# Altium PCB resistance_box_PCB.PcbDoc
Units mm, origin at the board's own origin, x right, y up, seen from the top; angles counter-clockwise.
Board outline 100 x 100 mm, 2 copper layers (Top Layer, Bottom Layer); 41 components, 39 nets, 226 pads, 4 vias.
Unrouted connection lines stored in the file: 26.
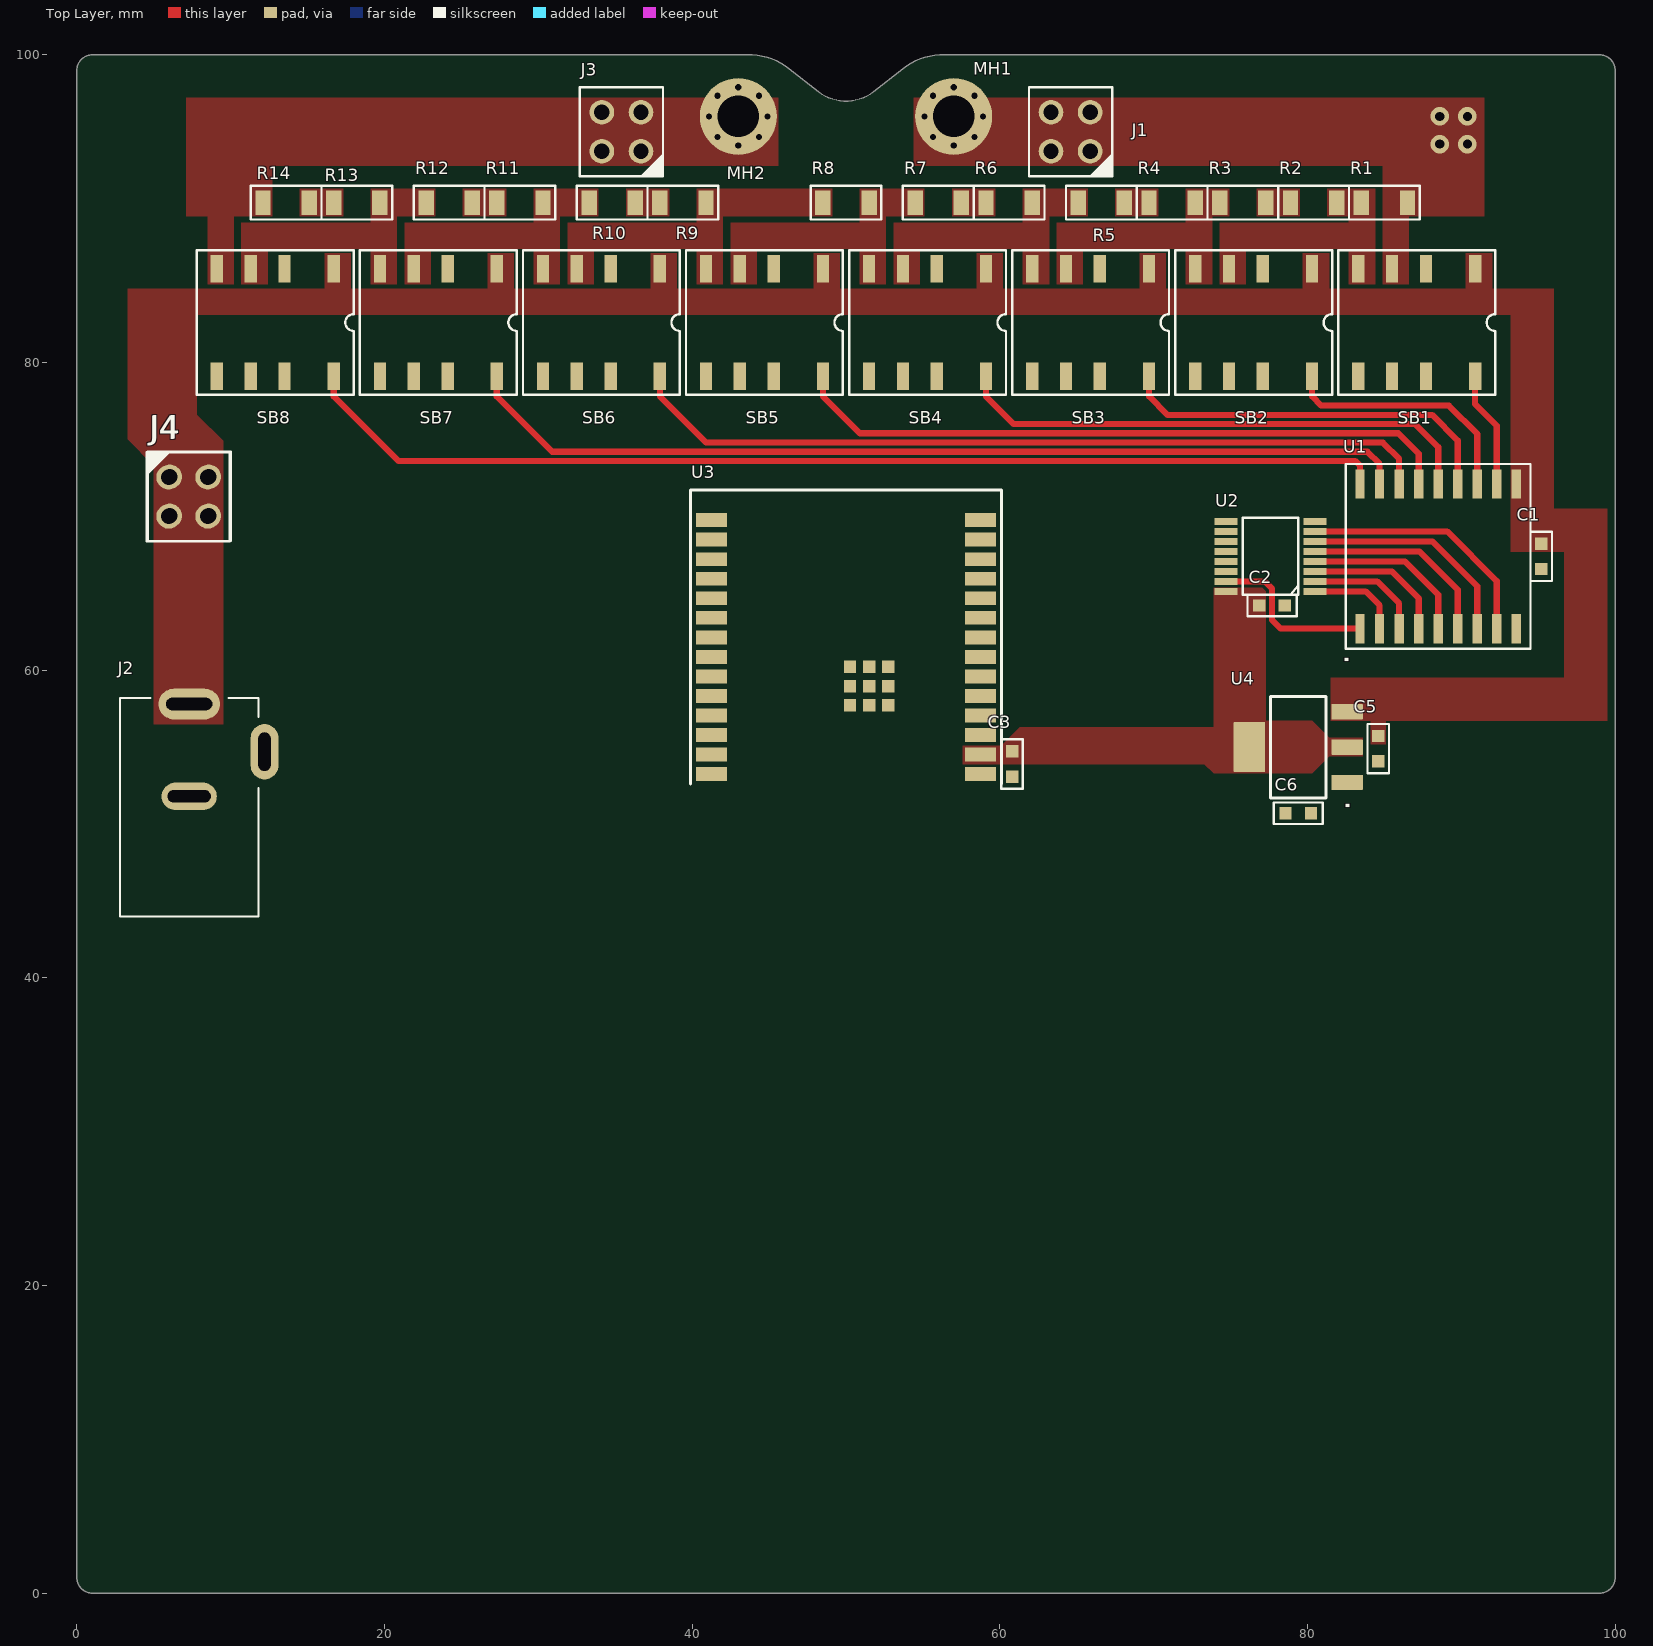
[diagram p0: Top Layer view]
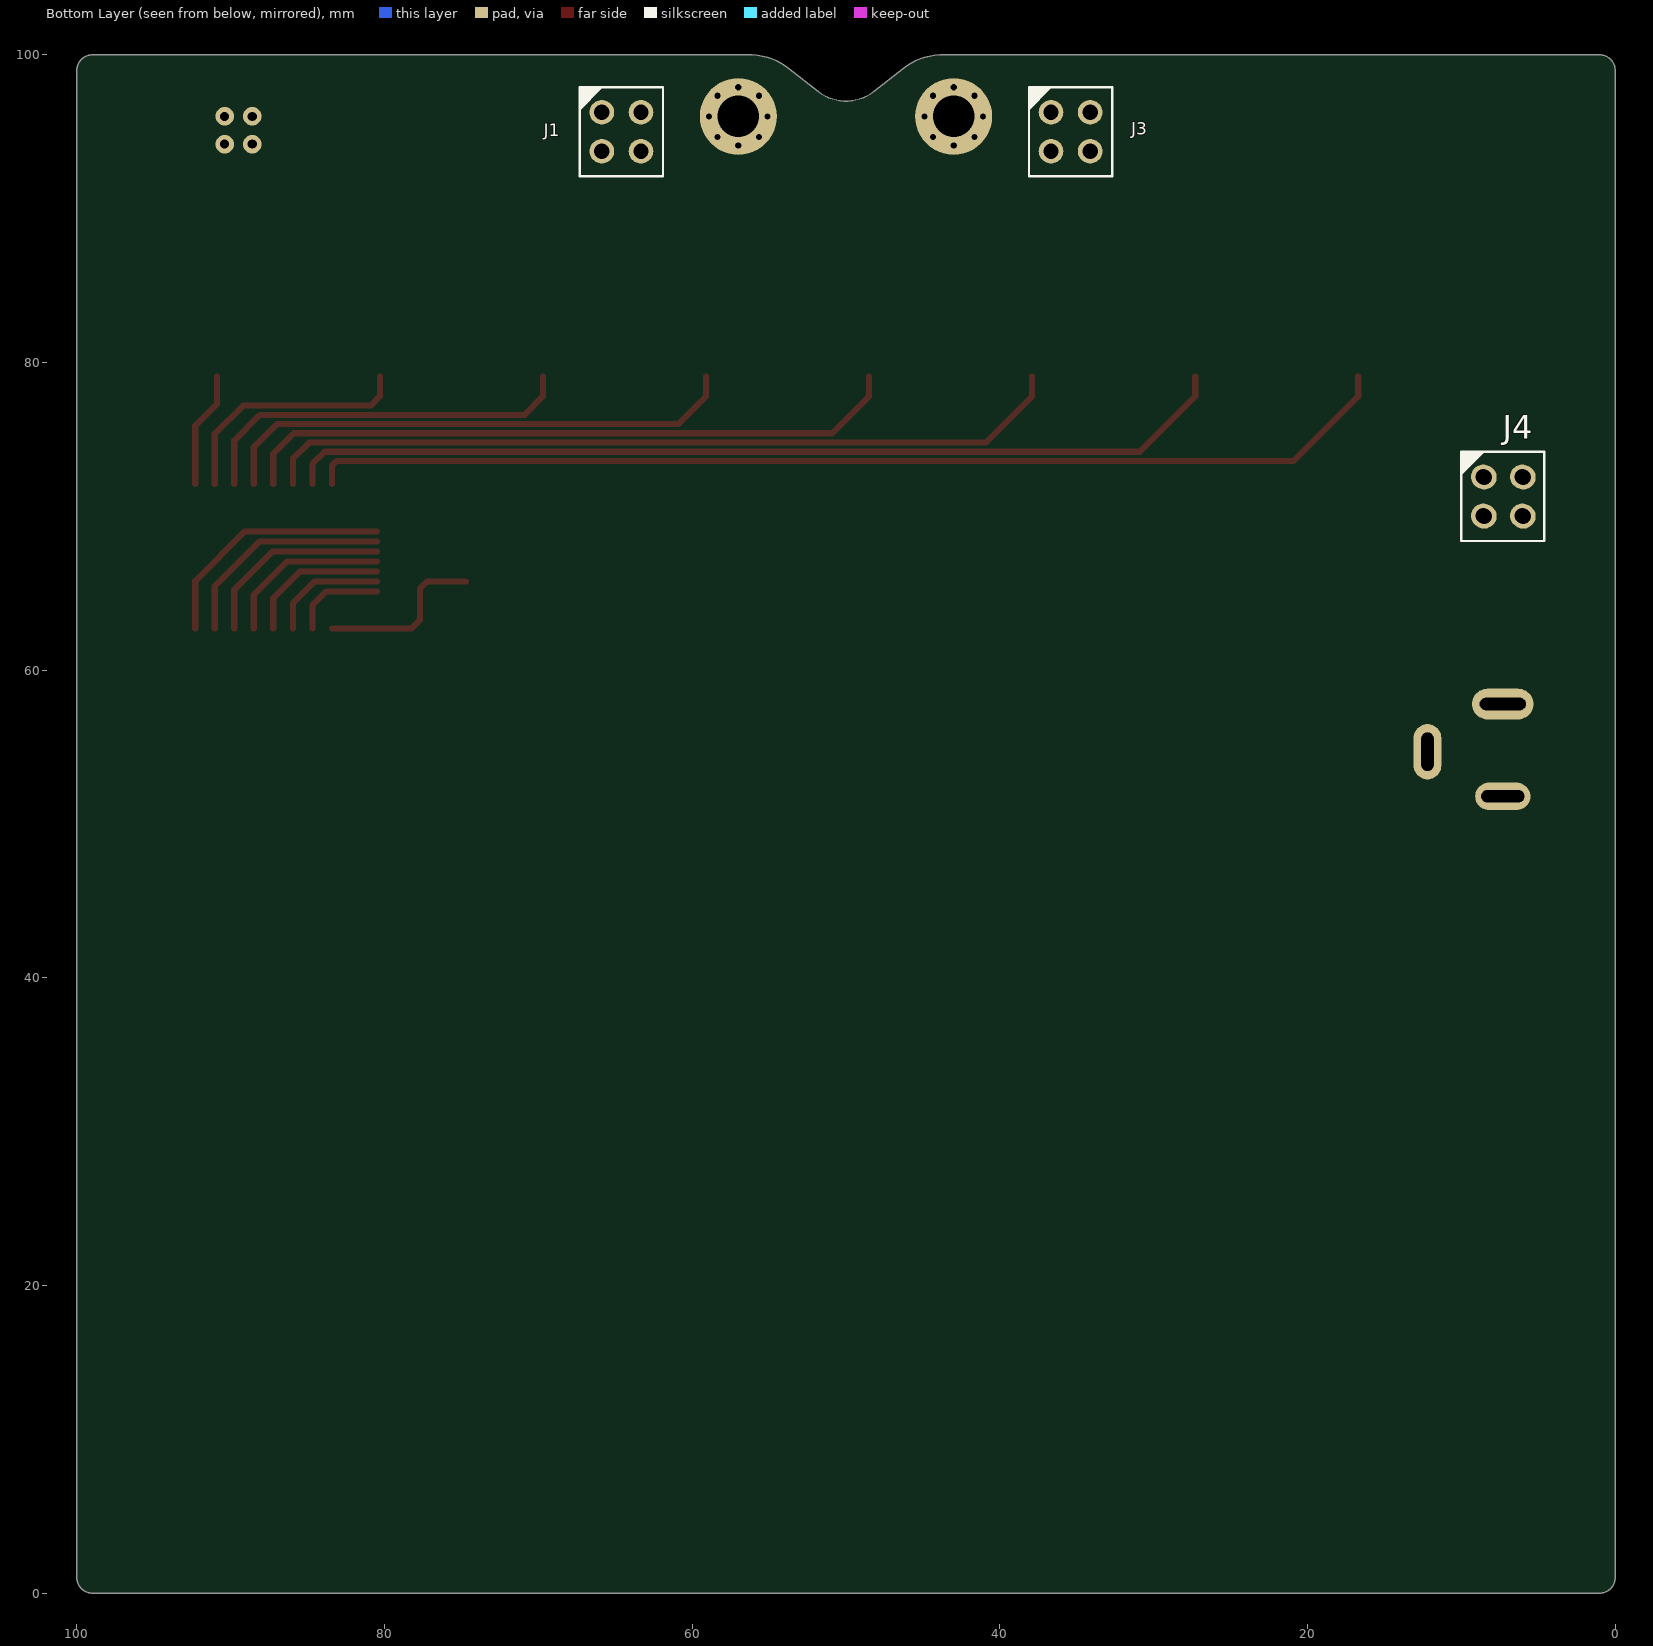
[diagram p1: Bottom Layer view, seen from below]
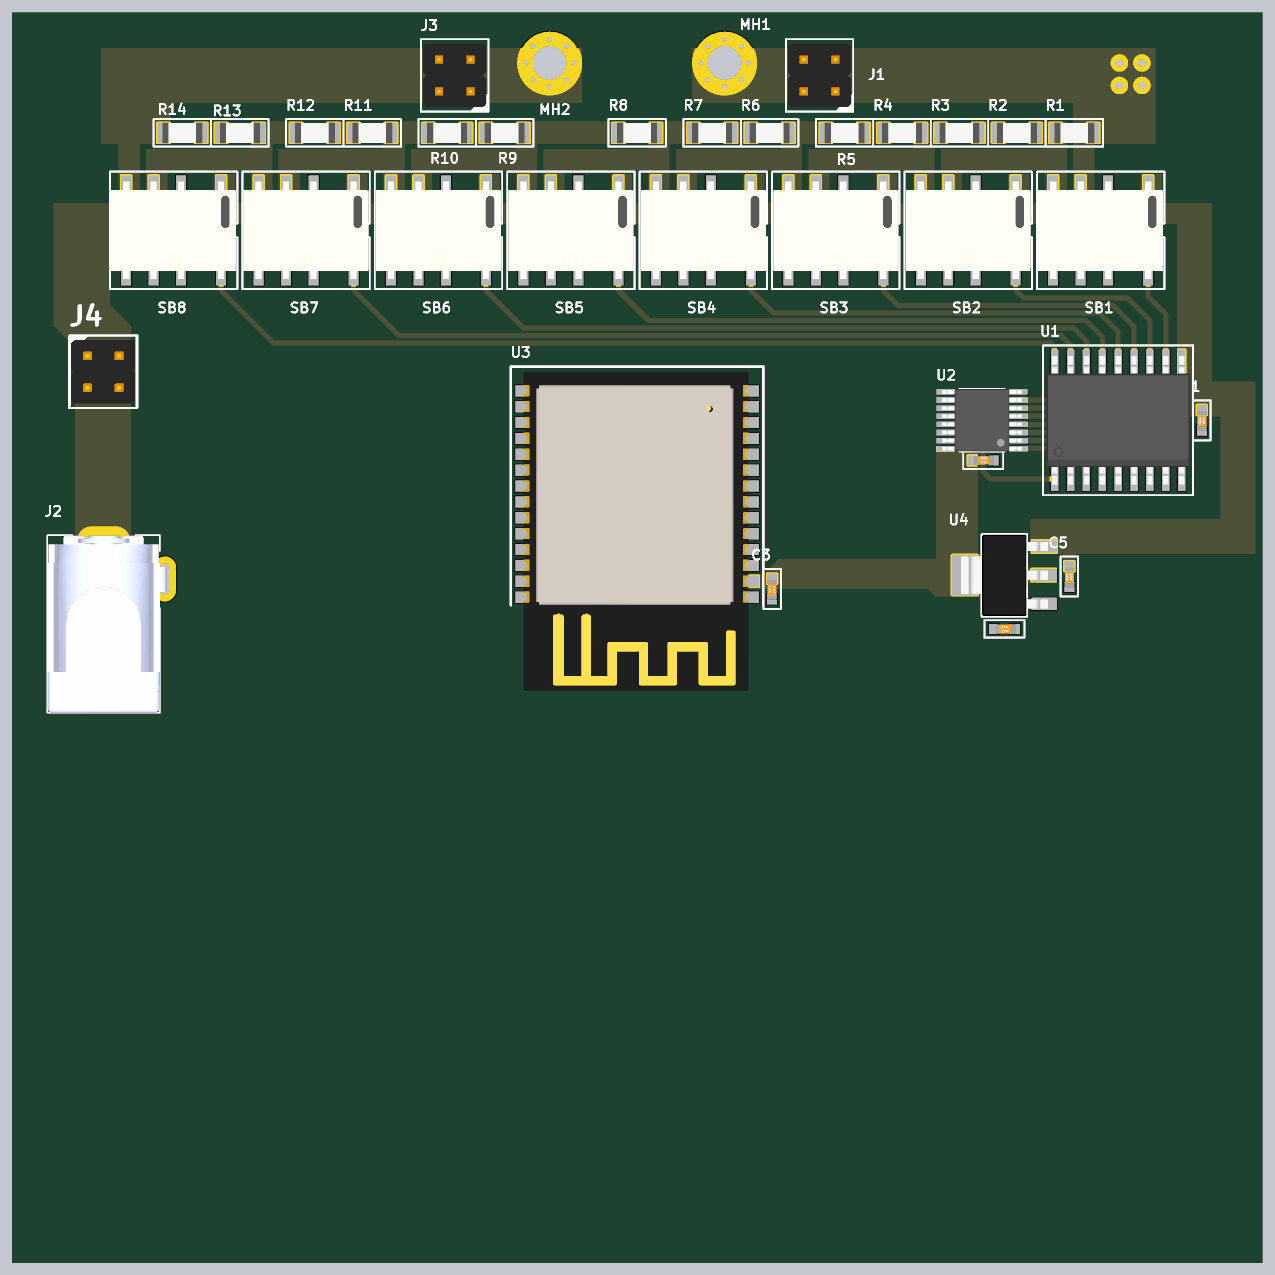
[diagram p2: 3D render of the assembled board from above, using the file's embedded part models]
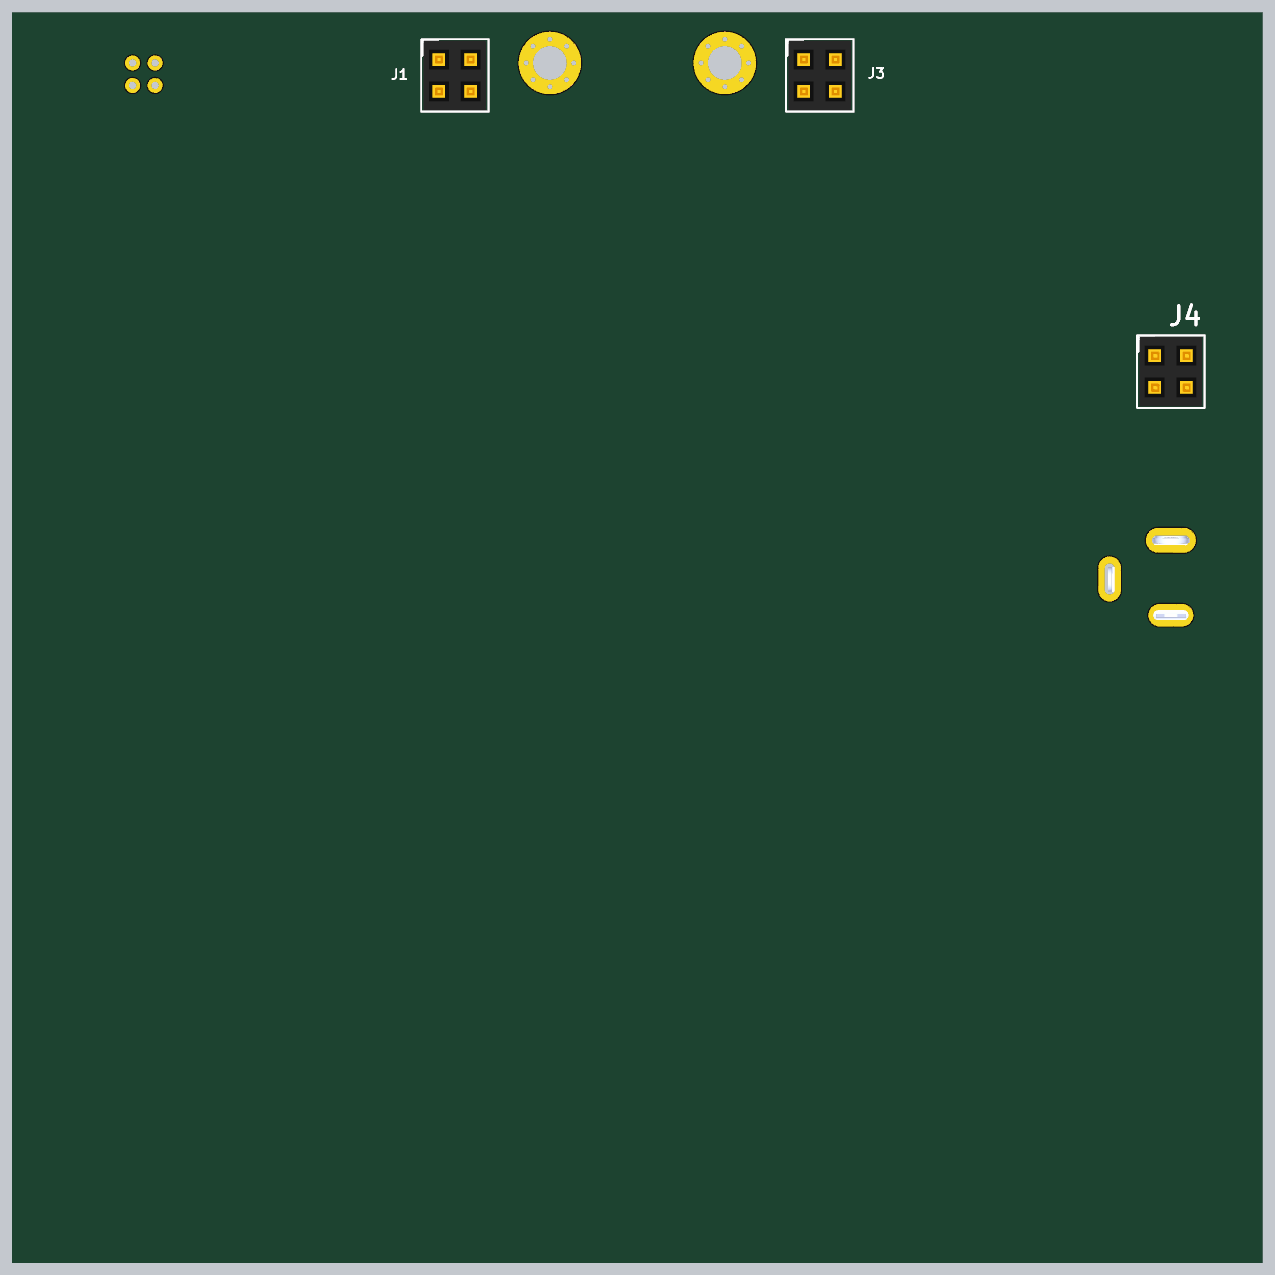
[diagram p3: 3D render of the assembled board from below, using the file's embedded part models]

## Layer stack, top to bottom
Top Solder: solder mask 0.0102, Solder Resist, Dk 3.5
Top Layer: signal copper 0.0356
Dielectric 1: dielectric 0.32, FR-4, Dk 4.8
Bottom Layer: signal copper 0.0356
Bottom Solder: solder mask 0.0102, Solder Resist, Dk 3.5

## Board outline
0,1 0,99 cw(c1,99) 1,100 43.9,100 cw(c43.715,95.856) 46.3,99.1 48.2,97.6 ccw(c50,99.992) 51.8,97.6 53.7,99.1 cw(c56.285,95.856) 56.1,100 99,100 cw(c99,99) 100,99 100,1 cw(c99,1) 99,0 1,0 cw(c1,1)

## Design rules (kind name [scope] priority, off if disabled: settings)
BoardOutlineClearance [All] p1: gap=0.3 ignorepadtopadclearanceinfootprint=FALSE except(0.4: Arc-SplitBarrior Arc-SplitContinuation Track-SplitBarrior Track-SplitContinuation SMDPad-SplitBarrior SMDPad-SplitContinuation THPad-SplitBarrior THPad-SplitContinuation Via-SplitBarrior Via-SplitContinuation Fill-SplitBarrior Fill-SplitContinuation Poly-SplitBarrior Poly-SplitContinuation Region-SplitBarrior Region-SplitContinuation Text-SplitBarrior Text-SplitContinuation)
Clearance "Clearance Different Nets" [All] p1: gap=0.2 ignorepadtopadclearanceinfootprint=FALSE except(0.089: Arc-Arc Arc-Track Arc-SMDPad Track-Track Track-SMDPad; 0.127: SMDPad-SMDPad SMDPad-Via THPad-Via Via-Via; 0.254: Arc-Via Arc-Text Track-Via Track-Text SMDPad-Text THPad-Text Via-Text Fill-Text Poly-Text Region-Text Text-Text; 0.5: THPad-THPad Via-Hole)
Clearance "Clearance Same Nets" [All] p2: gap=0.2 ignorepadtopadclearanceinfootprint=FALSE except(0.089: Arc-Arc Arc-Track Arc-SMDPad Track-Track Track-SMDPad SMDPad-SMDPad; 0.127: SMDPad-Via THPad-Via; 0.254: Arc-Via Arc-Text Track-Via Track-Text SMDPad-Text THPad-Text Via-Via Via-Text Fill-Text Poly-Text Region-Text Text-Text)
Clearance "Clearance Bottom Layer" [OnLayer('Bottom Layer')] p3: gap=0.203 ignorepadtopadclearanceinfootprint=TRUE except(0.254: Arc-Text Track-Text SMDPad-Text THPad-Text Via-Text Fill-Text Poly-Text Region-Text Text-Text)
Clearance "Clearance Top Layer" [OnLayer('Top Layer')] p4: gap=0.203 ignorepadtopadclearanceinfootprint=TRUE except(0.254: Arc-Text Track-Text SMDPad-Text THPad-Text Via-Text Fill-Text Poly-Text Region-Text Text-Text)
HoleSize [All] p1: absolutevalues=TRUE maxlimit=6.3 minlimit=0.2 maxpercent=80.000 minpercent=20.000
MinimumAnnularRing [All] p1: minimumring=0.13
MinimumSolderMaskSliver [All] p1: minsoldermaskwidth=0.1
PolygonConnect PolygonConnect_1 [All] p1: connectstyle=Direct reliefconductorwidth=0.508 reliefentries=4 polygonreliefangle="90 Angle" airgapwidth=0.254
RoutingCorners [All] p1: cornerstyle=Round minsetback=2.54 maxsetback=2.54
RoutingVias [All] p1: holewidth=0.5 width=1 viastyle="Through Hole" minholewidth=0.2 minwidth=0.35 maxholewidth=1 maxwidth=2
SilkToSilkClearance [All] p1: silktosilkclearance=0.1
SilkToSolderMaskClearance [IsPad] p1: minsilkscreentomaskgap=0.1 clearancetoexposedcopper=TRUE
SolderMaskExpansion [All] p1: expansion=0.102 istentingtop=FALSE
Width [All] p1: maxlimit=2.54 minlimit=0.089 preferedwidth=0.381
25 further rules are at their usual default settings.

## Classes and differential pairs
component class U_power: C5 C6 J2 J4 U4
component class U_mcu: C3 U3
component class main: J1 J3 MH1 MH2
component class U_resistors_set: C1 C2 R1 R2 R3 R4 R5 R6 R7 R8 R9 R10 R11 R12 R13 R14 SB1 SB2 SB3 SB4 SB5 SB6 SB7 SB8 U1 U2

## Components (designator, comment, footprint, x,y, rotation, side; value= is the part's Value field where it differs from the comment)
C1 "100nF" CAP0603 95.2,67.4 r90 top
C2 "100nF" CAP0603 77.7,64.2 r180 top
C3 "100nF" CAP0603 60.8,53.9 r90 top
C5 "100nF" CAP0603 84.6,54.9 r90 top
C6 "100nF" CAP0603 79.4,50.7 r180 top
J1 "PM254-2-02-Z-8.5" 254-2-2-Fem 64.6,95 r180 bottom
J1 "soon" 254-2-2-Male 64.6,95 r180 top
J2 "PJ-050A" CUI_PJ050A 7.3,57.8 r270 top
J3 "soon" 254-2-2-Male 35.4,95 r180 top
J3 "PM254-2-02-Z-8.5" 254-2-2-Fem 35.4,95 r180 bottom
J4 "PH-00068" 254-2-2-Male 7.23,71.27 r0 top
J4 "PH-00068" 254-2-2-Male 7.3,71.3 r0 top
J4 "PM254-2-02-Z-8.5" 254-2-2-Fem 7.3,71.3 r180 bottom
MH1 "5x2.5 mm" 5x2m7_plated_hole 57,96 r0 top
MH2 "5x2.5 mm" 5x2m7_plated_hole 43,96 r0 top
R1 "120" RES1206 85,90.4 r180 top
R2 "120" RES1206 80.4,90.4 r180 top
R3 "120" RES1206 75.8,90.4 r180 top
R4 "120" RES1206 71.2,90.4 r180 top
R5 "120" RES1206 66.6,90.4 r180 top
R6 "120" RES1206 60.6,90.4 r180 top
R7 "120" RES1206 56,90.4 r180 top
R8 "1k" RES1206 50,90.4 r180 top
R9 "1k" RES1206 39.4,90.4 r180 top
R10 "1k" RES1206 34.8,90.4 r180 top
R11 "1k" RES1206 28.8,90.4 r180 top
R12 "1k" RES1206 24.2,90.4 r180 top
R13 "1k" RES1206 18.2,90.4 r180 top
R14 "1k" RES1206 13.6,90.4 r180 top
SB1 "G6K-2F-Y-TR DC5" Omron_G6K-2F-Y 87.1,82.6 r270 top
SB2 "G6K-2F-Y-TR DC5" Omron_G6K-2F-Y 76.5,82.6 r270 top
SB3 "G6K-2F-Y-TR DC5" Omron_G6K-2F-Y 65.9,82.6 r270 top
SB4 "G6K-2F-Y-TR DC5" Omron_G6K-2F-Y 55.3,82.6 r270 top
SB5 "G6K-2F-Y-TR DC5" Omron_G6K-2F-Y 44.7,82.6 r270 top
SB6 "G6K-2F-Y-TR DC5" Omron_G6K-2F-Y 34.1,82.6 r270 top
SB7 "G6K-2F-Y-TR DC5" Omron_G6K-2F-Y 23.5,82.6 r270 top
SB8 "G6K-2F-Y-TR DC5" Omron_G6K-2F-Y 12.9,82.6 r270 top
U1 "ULN2803G-S18-R" SOIC-18-wide 88.5,67.4 r90 top
U2 "SN74HC595PWR" TSSOP16 77.6,67.4 r180 top
U3 "ESP32-C6-WROOM-1" ESP32-C6-WROOM-1 50,61.5 r180 top
U4 "LD1117AS33TR" SOT-223 79.4,55 r90 top

## Footprints (in the part's own frame and the unit in brackets; to place one, negate y for a bottom-side part, rotate by r counter-clockwise, add the part's x,y. Pads: shape width x height; smd on the part's side, far side on the other; paste and mask are expansions set on the pad)
5x2m7_plated_hole [mm]
  round 0.7 hole 0.4: MH(-1.9,0) MH(-1.344,-1.344) MH(-1.344,1.344) MH(0,-1.9) MH(0,1.9) MH(1.344,-1.344) MH(1.344,1.344) MH(1.9,0)
  round 5 hole 2.7: MH(0,0)
254-2-2-Fem [mm]
  round 1.6 hole 1 paste-2539.97: 1(-1.27,1.27) 2(-1.27,-1.27) 3(1.27,1.27) 4(1.27,-1.27)
  silkscreen extent -2.75,-2.9 2.7,2.9, body extent -2.52,-2.79 2.48,2.79, height 8.5
254-2-2-Male [mm]
  round 1.6 hole 1 paste-2539.97: 1(-1.27,1.27) 2(-1.27,-1.27) 3(1.27,1.27) 4(1.27,-1.27)
  silkscreen extent -2.75,-2.9 2.7,2.9, body extent -2.54,-2.54 2.54,2.54, height 8.89
CAP0603 [mm]
  rect 0.8x0.8 smd: 1(-0.825,0) 2(0.825,0)
  silkscreen extent -1.6,-0.7 1.6,0.7, body extent -0.86,-0.4 0.74,0.4, height 0.8
CUI_PJ050A [mm]
  oval 2x4 hole 0.8 slot 3 at 90 deg: 1(0,0)
  oval 1.8x3.6 hole 0.8 slot 2.8 at 90 deg: 2(6,0)
  oval 3.6x1.8 hole 0.8 slot 2.5 at 0 deg: 3(3.1,4.9)
  silkscreen extent -0.4,-4.5 13.8,4.5, body extent -0.37,-4.5 13.83,5.05, height 10.97
ESP32-C6-WROOM-1 [mm]
  rect 2x0.9 smd: 1(-8.75,8.255) 2(-8.75,6.985) 3(-8.75,5.715) 4(-8.75,4.445) 5(-8.75,3.175) 6(-8.75,1.905) 7(-8.75,0.635) 8(-8.75,-0.635) 9(-8.75,-1.905) 10(-8.75,-3.175) 11(-8.75,-4.445) 12(-8.75,-5.715) 13(-8.75,-6.985) 14(-8.75,-8.255) 15(8.75,-8.255) 16(8.75,-6.985) 17(8.75,-5.715) 18(8.75,-4.445) 19(8.75,-3.175) 20(8.75,-1.905) 21(8.75,-0.635) 22(8.75,0.635) 23(8.75,1.905) 24(8.75,3.175) 25(8.75,4.445) 26(8.75,5.715) 27(8.75,6.985) 28(8.75,8.255)
  rect 0.8x0.8 smd: 29(-2.755,2.535) 29(-2.755,3.785) 29(-2.755,1.285) 29(-1.505,3.785) 29(-1.505,2.535) 29(-1.505,1.285) 29(-0.255,3.785) 29(-0.255,2.535) 29(-0.255,1.285)
  silkscreen extent -10.1,-10.2 10.1,8.9, body extent -8.92,-9.77 9.08,15.73, height 3.16
Omron_G6K-2F-Y [mm]
  rect 1.8x0.8 smd: 1(-3.5,3.8) 2(-3.5,0.6) 3(-3.5,-1.6) 4(-3.5,-3.8) 5(3.5,-3.8) 6(3.5,-1.6) 7(3.5,0.6) 8(3.5,3.8)
  silkscreen extent -4.7,-5.1 4.7,5.1, body extent -3.9,-5 3.9,5, height 5.2
RES1206 [mm]
  rect 1x1.6 smd: 1(-1.5,0) 2(1.5,0)
  silkscreen extent -2.3,-1.1 2.3,1.1, body extent -1.6,-0.83 1.6,0.83, height 0.53
SOIC-18-wide [mm]
  rect 1.9x0.6 smd: 1(-4.7,5.08) 2(-4.7,3.81) 3(-4.7,2.54) 4(-4.7,1.27) 5(-4.7,0) 6(-4.7,-1.27) 7(-4.7,-2.54) 8(-4.7,-3.81) 9(-4.7,-5.08) 10(4.7,-5.08) 11(4.7,-3.81) 12(4.7,-2.54) 13(4.7,-1.27) 14(4.7,0) 15(4.7,1.27) 16(4.7,2.54) 17(4.7,3.81) 18(4.7,5.08)
  silkscreen extent -6,-6 6,6, body extent -5.15,-5.76 5.15,5.76, height 2.65
SOT-223 [mm]
  rrect10% 1x2.05 smd: 1(-2.3,-3.175) 2(0,-3.175) 3(2.3,-3.175)
  rrect5% 3.25x2.05 smd: 2(0,3.175)
  silkscreen extent -3.3,-1.8 3.3,1.8, body extent -3.25,-3.48 3.25,3.48, height 1.6
TSSOP16 [mm]
  rect 1.5x0.45 smd mask+0.02: 1(-2.9,2.275) 2(-2.9,1.625) 3(-2.9,0.975) 4(-2.9,0.325) 5(-2.9,-0.325) 6(-2.9,-0.975) 7(-2.9,-1.625) 8(-2.9,-2.275) 9(2.9,-2.275) 10(2.9,-1.625) 11(2.9,-0.975) 12(2.9,-0.325) 13(2.9,0.325) 14(2.9,0.975) 15(2.9,1.625) 16(2.9,2.275)
  silkscreen extent -1.8,-2.5 1.8,2.5, body extent -3.2,-2.5 3.2,2.5, height 1.1

## Part data
C1 C2 C3 C5 C6: library part GCM188R71H104KA57J, "Tolerance ±10% / Rated Voltage 50Vdc / Temperature 0±30ppm/℃", Case=0603, Manufacturer="Arrow Electronics", Supplier Part Number 1=81-GCM188R71H104KA7J, Tolerance=10%, Category="Multilayer Ceramic Capacitors - SMD/SMT", HelpURL=http://www.farnell.com/datasheets/4360.pdf?src-supplier=Element14, Item="100nF 50V  ±10%", Part Number=GCM188R71H104KA57J, Supplier 1=Mouser, Vdc=50V
J1 J3 J4: "2.54mm 2.54mm 3A Copper Alloy 4P -40℃~+105℃ 260℃@5S Straight 2x2P 8.5mm Top Square Holes Plugin,P=2.54mm Female Headers ROHS", Case=Female, Manufacturer=HCTL, Supplier Part Number 1=C2897403, Category="Headers & Wire Housings", HelpURL=https://datasheet.lcsc.com/lcsc/2306091005_HCTL-PM254-2-02-Z-8-5_C2897403.pdf?_gl=1*j2h43v*_ga*MTA1Mzg1NzAxMC4xNzEyNDA1NTIz*_ga_98M84MKSZH*MTcxNzc5MzMyMy44LjEuMTcxNzc5NDE5OC40My4wLjA., Item="Header 2.54 2x2 Female", Part Number=PM254-2-02-Z-8.5, Supplier 1=LCSC
J1 J3: "2.54mm 2.54mm 3A Copper Alloy 4P -40℃~+105℃ 260℃@5S Straight 2x2P 8.5mm Top Square Holes Plugin,P=2.54mm Female Headers ROHS"
J2: "DC Power Connectors Power Jacks Right Angle", Case=Female, Manufacturer="CUI Devices", Manufacturer Part Number=MJ-2506N, Supplier Part Number 1=490-PJ-050A, Category="DC Power Connectors", HelpURL=https://eu.mouser.com/datasheet/2/670/pj_050a-1778816.pdf, Item=PJ-050A, Part Number=PJ-050A, Supplier 1=Mouser
J4 J4: "3A Straight Square Pins 2.5mm 4P 6mm -40℃~+105℃ 3mm 2.54mm 双排 Black 2x2P 2.54mm Plugin,P=2.54mm Pin Headers ROHS"
MH1 MH2: library part none, "Plated hole 5x2.5 mm", Case=none, HelpURL=none, Item="5x2.5 mm", Manufacturer=none, Part Number=none, Supplier=none
R1 R2 R3 R4 R5 R6 R7: library part CR1206-FX-1200ELF, "Tolerance ±1% / Power (Watts) 0.25W, 1/4W / Temperature Coefficient ±100ppm/°C", Case=1206, Manufacturer=Bourns, Supplier Part Number 1=652-CR1206FX-1200ELF, Tolerance=1%, Category="Thin Film Resistors - SMD", HelpURL=https://eu.mouser.com/datasheet/2/54/cr-1858361.pdf, Item="120 ±1% 0.25W", Part Number=CR1206-FX-1200ELF, Supplier 1=Mouser
R8 R9 R10 R11 R12 R13 R14: library part CRT1206-FZ-1001ELF, "Tolerance ±1% / Power (Watts) 0.1W, 1/10W / Temperature Coefficient ±50ppm/°C", Case=1206, Manufacturer=Bourns, Supplier Part Number 1=652-CRT1206FZ1001ELF, Tolerance=1%, Category="Thin Film Resistors - SMD", HelpURL=https://eu.mouser.com/datasheet/2/54/CRT-1649066.pdf, Item="1k ±1% 0.25W", Part Number=CRT1206-FZ-1001ELF, Supplier 1=Mouser
SB1 SB2 SB3 SB4 SB5 SB6 SB7 SB8: "1A 5V DPDT (2 Form C) SMD,6.5x10mm Signal Relays ROHS", Case=SMD,6.5x10mm, Manufacturer="Omron Electronics", Supplier Part Number 1=C47190, Category="Relays/Signal Relays", HelpURL=https://www.lcsc.com/datasheet/lcsc_datasheet_2211282300_Omron-Electronics-G6K-2F-Y-TR-DC5_C47190.pdf, Item="G6K-2F-Y-TR DC5", Mechanical Life=N/A, Part Number="G6K-2F-Y-TR DC5", Supplier=LCSC, Switch Function="DPDT (2 Form C)", Vdss=5V
U1: "SOP-18 Darlington Transistor Arrays ROHS", Case=SOP-18, Manufacturer="UTC(Unisonic Tech)", Supplier Part Number 1=C33924, Category="Transistors/Thyristors/Darlington Transistor Arrays", Channel=NPN, HelpURL=https://www.lcsc.com/datasheet/lcsc_datasheet_1810241824_UTC-Unisonic-Tech-ULN2803G-S18-R_C33924.pdf, Id=500mA, Item=ULN2803, Part Number=ULN2803G-S18-R, Supplier 1=LCSC, Vds=50B
U2: "Counter Shift Registers 8-Bit Shift Register", Case=TSSOP-16, Manufacturer="Texas Instruments", Supplier Part Number 1=595-SN74HC595PWR, Category="Counter Shift Registers", HelpURL=https://www.ti.com/lit/ds/symlink/sn74hc595.pdf?HQS=dis-mous-null-mousermode-dsf-pf-null-wwe&ts=1631618497887&ref_url=https%253A%252F%252Fwww.mouser.it%252F, Item=SN74HC595, Part Number=SN74HC595PWR, Supplier 1=Mouser
U3: "ESP32-C6 module, Wi-Fi 6 in 2.4 GHz band, Bluetooth 5, Zigbee 3.0 and Thread. ESP34-WROOM Compatible", Case="Development Boards", Manufacturer="Espressif Systems", Category="Multiprotocol Modules", HelpURL=https://www.espressif.com/sites/default/files/documentation/esp32-c6-wroom-1_wroom-1u_datasheet_en.pdf, Interfaces="GPIO, SPI, UART, I2C, I2S, RMT", Item=ESP32-C6-WROOM-1, Part Number=ESP32-C6-WROOM-1, Supplier 1=Aliexpress, Supplier Part Number 1=ESP32-C6-WROOM-1, Vdss=3.3V
U4: "Linear Voltage Regulators 3.3V 1A Positive", Case=SOT-223, Input Voltage, Max=10, Manufacturer=STMicroelectronics, Output Current="1 A", Output Voltage=3,3, Category="Linear Voltage Regulators", HelpURL=https://static.chipdip.ru/lib/918/DOC012918569.pdf, Item=LD1117A, Part Number=LD1117AS33TR, Supplier 1=Chipdip, Supplier Part Number 1=LD1117AS33TR

## Via types
v1: diameter 1.2, hole 0.6, Top Layer to Bottom Layer, 4 vias

## Nets (pads, with @x,y where several pads share a name; then routed paths per layer and width w, separated by ;. In a path a pad name is that pad's centre, name@x,y a point inside that pad or via, vN(x,y) a via of type N, cw(c..) or ccw(c..) an arc to the next point about the centre after c; other vN are vias at no path point)
3v3: C2.2 C3.2 C6.2 U2.16 U3.2 U4.2
5v: C1.2 C5.2 J2.1 J4.1 J4.2 J4.3 J4.4 SB1.1 SB2.1 SB3.1 SB4.1 SB5.1 SB6.1 SB7.1 SB8.1 U1.10 U4.3
GND: C1.1 C2.1 C3.1 C5.1 C6.1 J2.2 J2.3 U1.9 U2.8 U3.1 U3.28 U3.29 U4.1
NetJ1_1: J1.1 J1.2 J1.3 J1.4 MH1.MH R1.1 SB1.3
  other v1: 88.6,94.2 90.4,94.2 88.6,96 90.4,96
NetJ3_1: J3.1 J3.2 J3.3 J3.4 MH2.MH R14.2 SB8.4
NetR1_2: R1.2 R2.1 SB1.4 SB2.3
NetR2_2: R2.2 R3.1
NetR3_2: R3.2 R4.1 SB2.4 SB3.3
NetR4_2: R4.2 R5.1
NetR5_2: R5.2 R6.1 SB3.4 SB4.3
NetR6_2: R6.2 R7.1
NetR7_2: R7.2 R8.1 SB4.4 SB5.3
NetR8_2: R8.2 R9.1 SB5.4 SB6.3
NetR9_2: R9.2 R10.1
NetR10_2: R10.2 R11.1 SB6.4 SB7.3
NetR11_2: R11.2 R12.1
NetR12_2: R12.2 R13.1 SB7.4 SB8.3
NetR13_2: R13.2 R14.1
NetSB1_8: SB1.8 U1.11 | length 7.6
  Top Layer w0.4: SB1.8 90.9,77.3 92.31,75.89 U1.11
NetSB2_8: SB2.8 U1.12 | length 16.3
  Top Layer w0.4: SB2.8 80.3,77.8 80.9,77.2 89.2,77.2 91.04,75.36 U1.12
NetSB3_8: SB3.8 U1.13 | length 25.4
  Top Layer w0.4: SB3.8 69.7,77.8 70.9,76.6 88.1,76.6 89.77,74.93 U1.13
NetSB4_8: SB4.8 U1.14 | length 34.5
  Top Layer w0.4: SB4.8 59.1,77.8 60.9,76 87,76 88.5,74.5 U1.14
NetSB5_8: SB5.8 U1.15 | length 43.5
  Top Layer w0.4: SB5.8 48.5,77.8 50.9,75.4 85.9,75.4 87.23,74.07 U1.15
NetSB6_8: SB6.8 U1.16 | length 52.7
  Top Layer w0.4: SB6.8 37.9,77.8 40.9,74.8 84.9,74.8 85.96,73.74 U1.16
NetSB7_8: SB7.8 U1.17 | length 61.8
  Top Layer w0.4: SB7.8 27.3,77.8 30.9,74.2 83.9,74.2 84.69,73.41 U1.17
NetSB8_8: SB8.8 U1.18 | length 71.1
  Top Layer w0.4: SB8.8 16.7,77.8 20.9,73.6 83.1,73.6 83.42,73.28 U1.18
NetU1_1: U1.1 U2.15 | length 11.2
  Top Layer w0.4: U2.15 77.225,65.775 77.7,65.3 77.7,63.253 78.253,62.7 U1.1
NetU1_2: U1.2 U2.1 | length 6.1
  Top Layer w0.4: U2.1 83.775,65.125 84.69,64.21 U1.2
NetU1_3: U1.3 U2.2 | length 7.7
  Top Layer w0.4: U2.2 84.525,65.775 85.96,64.34 U1.3
NetU1_4: U1.4 U2.3 | length 9.4
  Top Layer w0.4: U2.3 85.475,66.425 87.23,64.67 U1.4
NetU1_5: U1.5 U2.4 | length 11.1
  Top Layer w0.4: U2.4 86.325,67.075 88.5,64.9 U1.5
NetU1_6: U1.6 U2.5 | length 12.8
  Top Layer w0.4: U2.5 87.275,67.725 89.77,65.23 U1.6
NetU1_7: U1.7 U2.6 | length 14.5
  Top Layer w0.4: U2.6 88.125,68.375 91.04,65.46 U1.7
NetU1_8: U1.8 U2.7 | length 16.2
  Top Layer w0.4: U2.7 89.075,69.025 92.31,65.79 U1.8
NetU2_10: U2.10 U3.14
NetU2_11: U2.11 U3.13
NetU2_12: U2.12 U3.12
NetU2_13: U2.13 U3.11
NetU2_14: U2.14 U3.10
pads on no net: SB1.2 SB1.5 SB1.6 SB1.7 SB2.2 SB2.5 SB2.6 SB2.7 SB3.2 SB3.5 SB3.6 SB3.7 SB4.2 SB4.5 SB4.6 SB4.7 SB5.2 SB5.5 SB5.6 SB5.7 SB6.2 SB6.5 SB6.6 SB6.7 SB7.2 SB7.5 SB7.6 SB7.7 SB8.2 SB8.5 SB8.6 SB8.7 U2.9 U3.3 U3.4 U3.5 U3.6 U3.7 U3.8 U3.9 U3.15 U3.16 U3.17 U3.18 U3.19 U3.20 U3.21 U3.22 U3.23 U3.24 U3.25 U3.26 U3.27

## Polygon pours and split planes (outlines as drawn)
5v on Top Layer (solid, pour order 43): 3.3,84.8 17.8,84.8 17.8,83.1 7.8,83.1 7.8,76.6 9.5,74.9 9.5,56.5 5,56.5 5,73.3 3.3,75
NetR8_2 on Top Layer "NETR8_2_L01_P005" (solid, pour order 5): 49.1,91.3 40.3,91.3 40.3,85.1 42,85.1 42,89.5 49.1,89.5
3v3 on Top Layer "3V3_L01_P040" (solid, pour order 40): 57.6,55.1 57.6,53.9 73.3,53.9 73.9,53.3 74.3,53.3 74.3,56.3 61.3,56.3 60.1,55.1
5v on Top Layer "5V_L01_P039" (solid, pour order 39): 84.1,56.7 84.1,55.2 85.1,55.2 85.1,56.7 99.5,56.7 99.5,59.5 81.5,59.5 81.5,56.7
5v on Top Layer "5V_L01_P038" (solid, pour order 38): 96.7,56.7 99.5,56.7 99.5,70.5 96.7,70.5
5v on Top Layer "5V_L01_P037" (solid, pour order 37): 99.5,67.7 99.5,70.5 93.2,70.5 93.2,67.7
3v3 on Top Layer "3V3_L01_P036" (solid, pour order 36): 83.6,55.6 83.6,54.4 81.4,54.4 80.3,53.3 73.9,53.3 73.9,56.7 80.3,56.7 81.4,55.6
5v on Top Layer "5V_L01_P033" (solid, pour order 33): 96,84.8 96,67.7 93.2,67.7 93.2,83.1 90.3,83.1 90.3,87.1 92,87.1 92,84.8
NetJ1_1 on Top Layer "NETJ1_1_L01_P035" (solid, pour order 35): 91.5,92.8 91.5,97.2 54.4,97.2 54.4,92.8
NetJ3_1 on Top Layer "NETJ3_1_L01_P034" (solid, pour order 34): 7.1,92.8 7.1,97.2 45.6,97.2 45.6,92.8
5v on Top Layer "5V_L01_P032" (solid, pour order 32): 92,83.1 79.7,83.1 79.7,87.1 81.4,87.1 81.4,84.8 92,84.8
5v on Top Layer "5V_L01_P031" (solid, pour order 31): 81.4,83.1 69.1,83.1 69.1,87.1 70.8,87.1 70.8,84.8 81.4,84.8
5v on Top Layer "5V_L01_P030" (solid, pour order 30): 70.8,83.1 58.5,83.1 58.5,87.1 60.2,87.1 60.2,84.8 70.8,84.8
5v on Top Layer "5V_L01_P029" (solid, pour order 29): 60.2,83.1 47.9,83.1 47.9,87.1 49.6,87.1 49.6,84.8 60.2,84.8
5v on Top Layer "5V_L01_P028" (solid, pour order 28): 49.6,83.1 37.3,83.1 37.3,87.1 39,87.1 39,84.8 49.6,84.8
5v on Top Layer "5V_L01_P027" (solid, pour order 27): 39,83.1 26.7,83.1 26.7,87.1 28.4,87.1 28.4,84.8 39,84.8
5v on Top Layer "5V_L01_P026" (solid, pour order 26): 28.4,83.1 16.1,83.1 16.1,87.1 17.8,87.1 17.8,84.8 28.4,84.8
NetR1_2 on Top Layer "NETR1_2_L01_P025" (solid, pour order 25): 84.4,89.1 74.3,89.1 74.3,85.1 76,85.1 76,87.4 84.4,87.4
NetR3_2 on Top Layer "NETR3_2_L01_P024" (solid, pour order 24): 73.8,89.1 63.7,89.1 63.7,85.1 65.4,85.1 65.4,87.4 73.8,87.4
NetR5_2 on Top Layer "NETR5_2_L01_P023" (solid, pour order 23): 63.2,89.1 53.1,89.1 53.1,85.1 54.8,85.1 54.8,87.4 63.2,87.4
NetR7_2 on Top Layer "NETR7_2_L01_P022" (solid, pour order 22): 52.6,89.1 42.5,89.1 42.5,85.1 44.2,85.1 44.2,87.4 52.6,87.4
NetR8_2 on Top Layer "NETR8_2_L01_P021" (solid, pour order 21): 42,89.1 31.9,89.1 31.9,85.1 33.6,85.1 33.6,87.4 42,87.4
NetR10_2 on Top Layer "NETR10_2_L01_P020" (solid, pour order 20): 31.4,89.1 21.3,89.1 21.3,85.1 23,85.1 23,87.4 31.4,87.4
NetR12_2 on Top Layer "NETR12_2_L01_P019" (solid, pour order 19): 20.8,89.1 10.7,89.1 10.7,85.1 12.4,85.1 12.4,87.4 20.8,87.4
NetR1_2 on Top Layer "Top Layer-NetR1_2" (solid, pour order 17): 82.7,85.1 84.4,85.1 84.4,91.3 81.3,91.3 81.3,89.5 82.7,89.5
NetR2_2 on Top Layer "NETR2_2_L01_P015" (solid, pour order 15): 76.7,91.3 79.5,91.3 79.5,89.5 76.7,89.5
NetR4_2 on Top Layer "NETR4_2_L01_P014" (solid, pour order 14): 67.5,91.3 70.3,91.3 70.3,89.5 67.5,89.5
NetR6_2 on Top Layer "NETR6_2_L01_P013" (solid, pour order 13): 56.9,91.3 59.7,91.3 59.7,89.5 56.9,89.5
NetR9_2 on Top Layer "NETR9_2_L01_P012" (solid, pour order 12): 35.7,91.3 38.5,91.3 38.5,89.5 35.7,89.5
NetR11_2 on Top Layer "NETR11_2_L01_P011" (solid, pour order 11): 25.1,91.3 27.9,91.3 27.9,89.5 25.1,89.5
NetJ1_1 on Top Layer "NETJ1_1_L01_P010" (solid, pour order 10): 91.5,97.2 84.9,97.2 84.9,85.1 86.6,85.1 86.6,89.5 91.5,89.5
NetR3_2 on Top Layer "NETR3_2_L01_P008" (solid, pour order 8): 74.9,91.3 72.1,91.3 72.1,85.1 73.8,85.1 73.8,89.5 74.9,89.5
NetR5_2 on Top Layer "NETR5_2_L01_P007" (solid, pour order 7): 65.7,91.3 61.5,91.3 61.5,85.1 63.2,85.1 63.2,89.5 65.7,89.5
NetR7_2 on Top Layer "NETR7_2_L01_P006" (solid, pour order 6): 55.1,91.3 50.9,91.3 50.9,85.1 52.6,85.1 52.6,89.5 55.1,89.5
NetR10_2 on Top Layer "NETR10_2_L01_P004" (solid, pour order 4): 33.9,91.3 29.7,91.3 29.7,85.1 31.4,85.1 31.4,89.5 33.9,89.5
NetR12_2 on Top Layer "NETR12_2_L01_P003" (solid, pour order 3): 23.3,91.3 19.1,91.3 19.1,85.1 20.8,85.1 20.8,89.5 23.3,89.5
NetR13_2 on Top Layer "NETR13_2_L01_P002" (solid, pour order 2): 14.5,91.3 17.3,91.3 17.3,89.5 14.5,89.5
NetJ3_1 on Top Layer "NETJ3_1_L01_P001" (solid, pour order 1): 7.1,97.2 7.1,89.5 8.5,89.5 8.5,85.1 10.2,85.1 10.2,89.5 12.7,89.5 12.7,97.2
3v3 on Top Layer "3V3_L01_P000" (solid, pour order 0): 73.9,65.4 77.3,65.4 77.3,53.3 73.9,53.3

## Silkscreen, mask and mechanical layers (free items; w line width, h text height)
Mechanical 1:
  lines w0.153: 0,50 100,50 ; 50,0 50,100
Board:
  the board outline again, w0.1